# Altium PCB SiLPA_HE.PcbDoc (part 9 of 10)
Units mm, origin at the board's own origin, x right, y up, seen from the top; angles counter-clockwise.
Board outline 222.47 x 100.01 mm, 4 copper layers (Top Layer, Int1 (GND), Int2 (PWR), Bottom Layer), stack 1.508 mm thick; 661 components, 355 nets, 1925 pads, 1744 vias.
Unrouted connection lines stored in the file: 360.
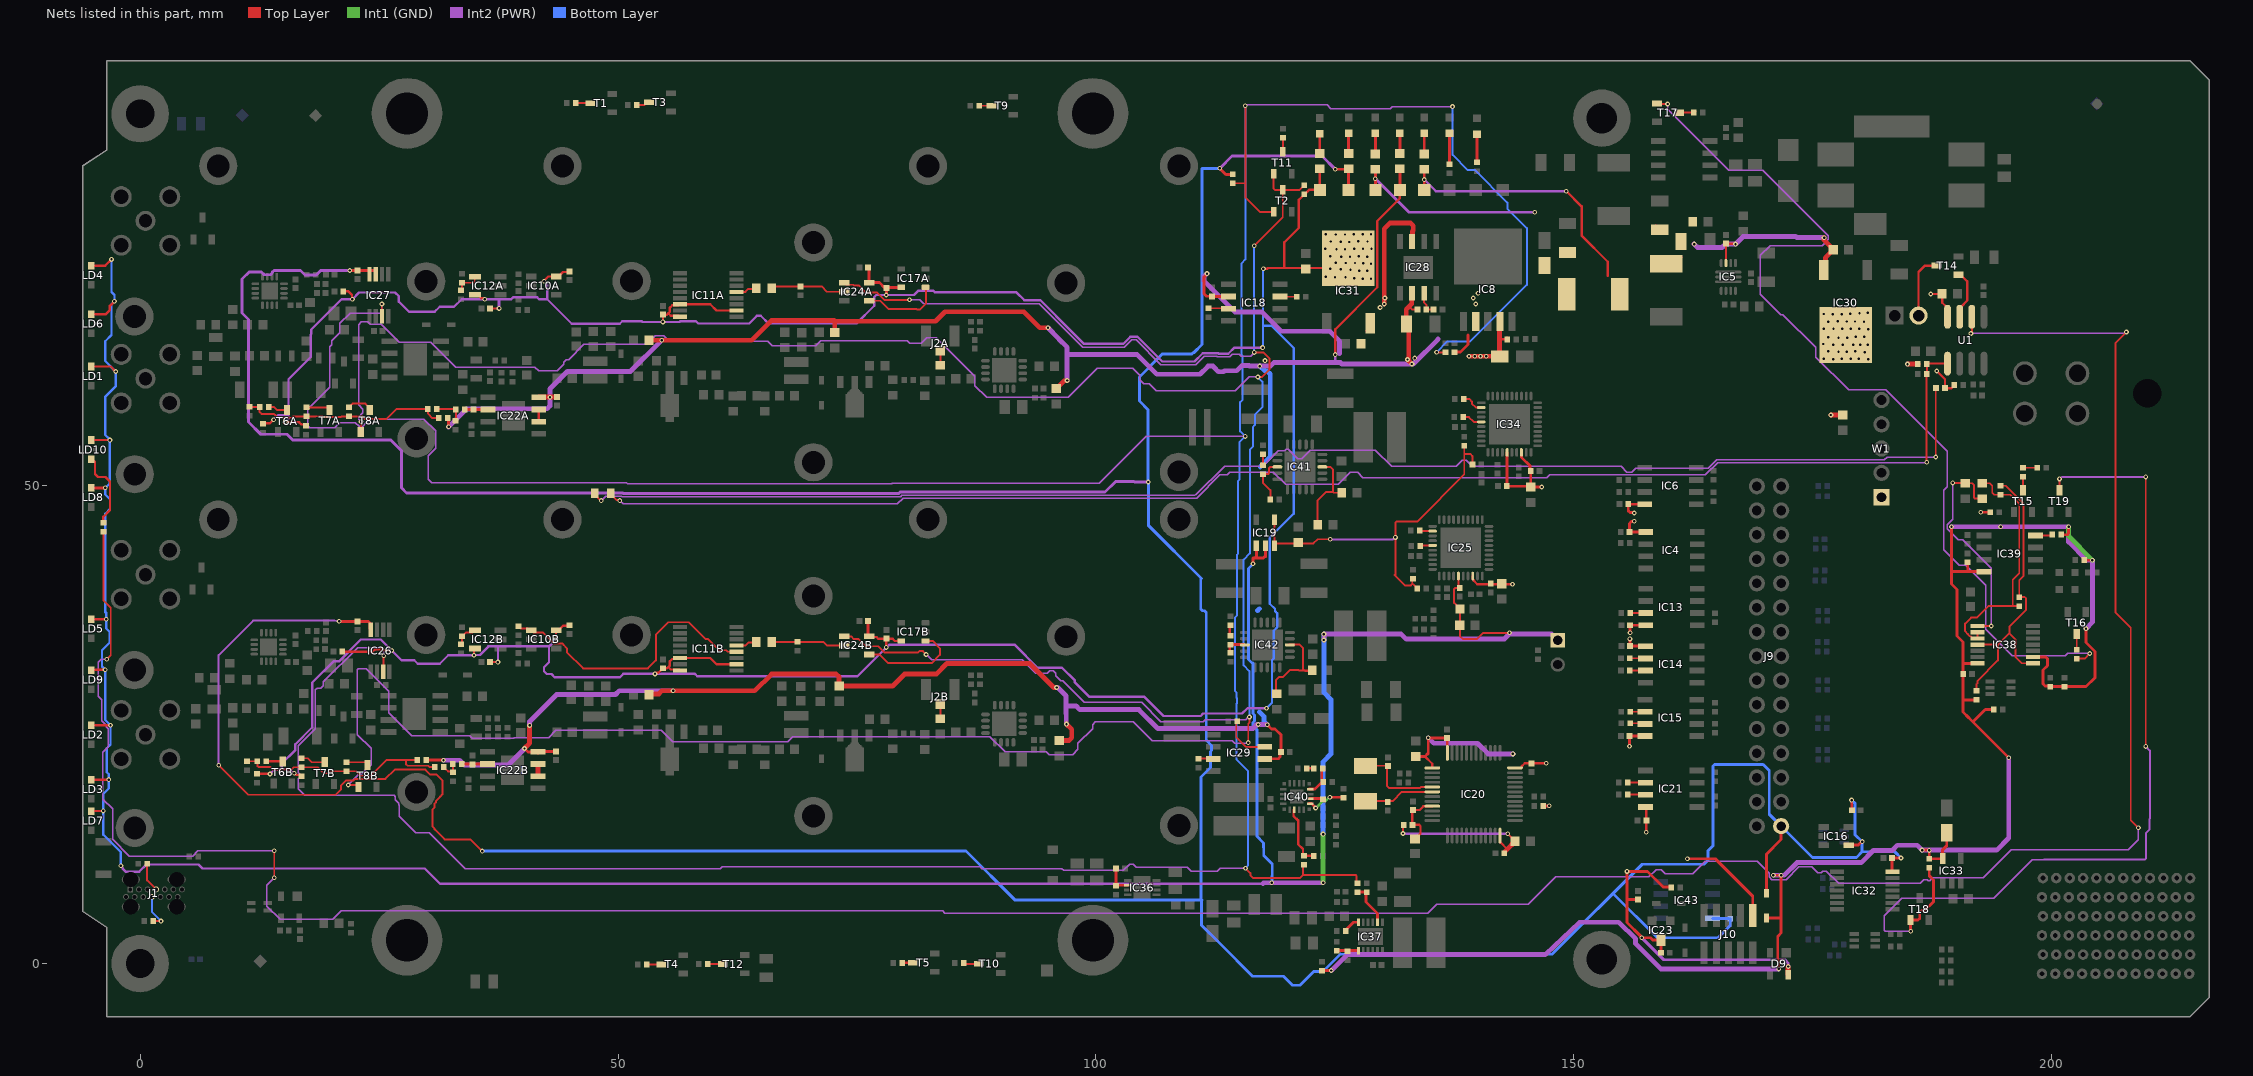
[diagram p8: the nets of this part, all layers, seen from the top]

## Via types
v1: diameter 0.5, hole 0.25, Top Layer to Bottom Layer, tented both sides, 1439 vias
v2: diameter 0.5, hole 0.25, Top Layer to Bottom Layer, tented bottom, 291 vias
v3: diameter 0.5, hole 0.25, Top Layer to Bottom Layer, 12 vias
v4: diameter 0.5, hole 0.25, Top Layer to Bottom Layer, tented top, 2 vias

## Nets (pads, with @x,y where several pads share a name; then routed paths per layer and width w, separated by ;. In a path a pad name is that pad's centre, name@x,y a point inside that pad or via, vN(x,y) a via of type N, cw(c..) or ccw(c..) an arc to the next point about the centre after c; other vN are vias at no path point) (continued)
NetIC10B_1: IC10B.1 IC11B.4 R23B.2 | length 29.2
  Top Layer w0.2: R23B.2@39.587,35.288 39.801,35.074 40.546,35.074 IC10B.1@40.677,34.943 ; IC10B.1@40.917,34.873 41.141,34.649 42.137,34.649 43.286,33.5 44.161,33.5 44.294,33.367 44.294,33.333 44.642,32.985 44.642,32.592 46.344,30.889 53.125,30.889 53.963,31.728 53.963,34.392 55.277,35.705 57.415,35.705 59.177,33.943 59.427,33.943 60.592,32.778 61.334,32.778 61.493,32.618 IC11B.4@62.102,32.618
NetIC11A_5: IC11A.5 R25A.1 | length 2.2
  Top Layer w0.2: IC11A.5@62.377,70.268 62.383,70.274 63.331,70.274 63.645,70.588 64.322,70.588 R25A.1@64.427,70.693
NetIC11B_5: IC11B.5 R25B.1 | length 2.2
  Top Layer w0.2: IC11B.5@62.377,33.268 62.383,33.274 63.331,33.274 63.645,33.588 64.322,33.588 R25B.1@64.427,33.693
NetIC12A_4: IC12A.4 R32A.2 R33A.2 | length 2.7
  Top Layer w0.2: R32A.2@33.427,70.443 33.447,70.443 R32A.2@33.637,70.633 ; 33.677,70.75 R33A.2@33.677,71.223 34.896,71.223 35.013,71.34 IC12A.4@35.013,71.862
NetIC12B_4: IC12B.4 R32B.2 R33B.2 | length 2.5
  Top Layer w0.2: R32B.2@33.447,33.443 33.504,33.443 33.664,33.603 33.664,34.21 R33B.2@33.677,34.223 33.697,34.223 34.112,34.638 34.789,34.638 IC12B.4@35.013,34.862
NetIC13_7: IC13.7 R39.2 | length 1.6
  Top Layer w0.2: R39.2@155.875,36.67 155.88,36.665 IC13.7@157.505,36.665
NetIC14_2: IC14.2 R42.2 | length 1.6
  Top Layer w0.2: R42.2@155.864,31.944 IC14.2@157.494,31.944
NetIC14_3: IC14.3 R43.2 | length 1.6
  Top Layer w0.2: R43.2@155.864,30.674 IC14.3@157.494,30.674
NetIC15_6: IC15.6 R47.2 | length 1.6
  Top Layer w0.2: R47.2@155.897,26.342 IC15.6@157.451,26.342
NetIC15_7: IC15.7 R45.2 | length 1.6
  Top Layer w0.2: R45.2@155.897,25.139 157.384,25.139 IC15.7@157.451,25.072
NetIC17A_1: IC17A.1 IC24A.4 | length 8.3
  Top Layer w0.2: IC24A.4@76.26,69.338 77.424,69.338 78.275,68.488 81.219,68.488 81.286,68.42 81.568,68.42 82.225,69.077 82.225,70.694 IC17A.1@82.167,70.752
NetIC17B_1: IC17B.1 IC24B.4 | length 10.7
  Top Layer w0.2: IC24B.4@76.26,32.338 77.336,32.338 78.249,31.425 82.808,31.425 83.677,32.293 83.677,32.979 82.904,33.752 IC17B.1@82.167,33.752
NetIC18_3: IC18.3 R176.1 | length 1.8
  Top Layer w0.2: IC18.3@119.252,69.789 119.278,69.763 R176.1@121.018,69.763
NetIC18_7: IC18.7 R174.1 | length 2.1
  Top Layer w0.2: R174.1@111.783,68.555 113.816,68.555 IC18.7@113.852,68.519
NetIC21_6: IC21.6 R119.2 | length 1.8
  Top Layer w0.2: R119.2@155.647,18.943 157.457,18.943 IC21.6@157.477,18.923
NetIC21_7: IC21.7 R117.2 | length 1.8
  Top Layer w0.2: R117.2@155.647,17.693 157.437,17.693 IC21.7@157.477,17.653
NetIC22A_2: IC22A.2 R125A.2 R126A.1 | length 2.4
  Top Layer w0.3: R126A.1@33.974,57.968 R125A.2@34.866,57.968 R125A.2@34.866,57.968 36.406,57.966 IC22A.2@36.407,57.965
NetIC22A_6: IC22A.6 IC22A.7 | length 1.3
  Top Layer w0.3: IC22A.6@41.707,56.695 IC22A.7@41.707,57.965
NetIC22B_2: IC22B.2 R125B.2 R126B.1 | length 2.4
  Top Layer w0.3: R126B.1@33.897,20.878 34.789,20.878 IC22B.2@36.33,20.878
NetIC22B_6: IC22B.6 IC22B.7 | length 1.3
  Top Layer w0.508: IC22B.6@41.63,19.608 IC22B.7@41.63,20.878
NetIC24A_1: IC24A.1 IC24B.1 R20.2 T2.3 T8A.1 T8B.1 T11.1 | length 396.2
  Top Layer w0.2: v1(21.771,18.684) 22.323,18.684 22.649,18.684 T8B.1@22.839,18.494 ; T8A.1@23.072,55.625 23.112,55.665 v1(23.112,56.684) ; IC24B.1@73.66,34.238 74.382,34.238 74.677,33.943 75.177,33.943 75.927,33.193 77.241,33.193 77.87,32.565 81.383,32.565 81.511,32.693 81.896,32.693 82.232,32.357 v1(82.232,32.338) ; IC24A.1@73.66,71.238 73.884,71.014 74.606,71.014 74.677,70.943 75.177,70.943 75.927,70.193 77.105,70.193 77.899,69.399 80.449,69.399 v1(80.494,69.443) ; v1(115.928,23.116) 115.928,25.079 116.048,25.199 116.048,25.659 v1@116.148,25.759 ; v1(116.552,63.936) 117.496,63.936 118.154,63.278 118.154,62.185 117.332,61.363 v1(116.938,61.363) ; v1(116.552,75.105) 119.543,78.096 T2.3@119.543,80.943 ; T11.1@118.593,82.629 118.593,81.06 118.71,80.943 T2.3@119.543,80.943 ; R20.2@121.788,81.413 121.768,81.413 121.298,80.943 T2.3@119.543,80.943
  Int2 (PWR) w0.15: v1(21.771,18.684) 22.875,19.789 23.119,19.789 24.156,20.826 24.156,22.516 22.733,23.939 22.733,30.725 22.843,30.835 23.681,30.835 26.023,28.493 26.023,26.249 28.411,23.86 34.469,23.86 34.738,23.592 39.077,23.592 39.133,23.648 42.734,23.648 43.475,24.389 54.531,24.389 55.707,23.213 67.759,23.213 68.288,23.742 88.909,23.742 90.496,22.156 94.824,22.156 95.108,21.871 97.561,21.871 98.115,22.425 98.115,23.031 99.648,24.565 99.648,24.996 99.928,25.275 103.912,25.275 105.885,23.302 114.271,23.302 114.522,23.051 115.862,23.051 v1(115.928,23.116) ; v1(23.112,56.684) 23.112,56.699 22.865,56.947 22.865,57.166 23.317,57.618 23.317,57.992 22.865,58.444 22.865,66.857 23.145,67.137 23.802,67.137 24.069,66.87 25.25,66.87 27.098,65.022 30.408,65.022 33.038,62.393 41.303,62.393 41.684,62.011 43.643,62.011 44.336,62.704 44.336,62.928 44.6,63.192 44.824,63.192 46.402,64.77 52.996,64.77 53.894,65.669 54.757,65.669 55.326,65.101 65.637,65.101 66.124,64.614 70.679,64.614 71.223,65.158 80.263,65.158 80.507,64.914 81.729,64.914 82.284,65.469 83.286,65.469 87.338,61.418 87.338,60.431 88.547,59.221 97.088,59.221 100.141,62.274 103.867,62.274 104.587,61.554 104.587,61.067 104.989,60.665 105.475,60.665 105.476,60.664 105.572,60.664 106.296,59.94 114.574,59.94 116.042,61.408 116.893,61.408 v1(116.938,61.363) ; v1(80.494,69.443) 81.577,69.443 81.979,69.041 94.066,69.041 98.61,64.498 102.968,64.498 102.973,64.503 102.98,64.503 103.737,65.26 104.193,65.26 106.79,62.663 110.459,62.663 111.311,63.515 112.659,63.515 112.705,63.469 113.976,63.469 114.242,63.735 114.969,63.735 115.184,63.521 116.182,63.521 116.552,63.891 v1(116.552,63.936) ; v1(82.232,32.338) 82.806,31.764 92.261,31.764 93.674,30.352 94.884,30.352 95.149,30.616 95.523,30.616 95.788,30.352 95.788,30.087 96.299,29.576 96.546,29.576 98.797,27.325 104.78,27.325 106.796,25.31 111.221,25.31 111.436,25.525 115.678,25.525 115.953,25.8 v1(116.048,25.8)
  Bottom Layer w0.2: v1(116.048,25.8) 116.048,30.596 115.445,31.199 115.445,42.26 116.102,42.917 116.102,53.757 116.409,54.064 116.409,56.133 116.623,56.346 116.623,57.436 117.41,58.222 117.41,60.891 v1(116.938,61.363) ; v1(116.552,63.936) v1(116.552,75.105)
NetIC24A_2: IC24A.2 R25A.2 R166A.2 | length 7.9
  Top Layer w0.2: R25A.2@66.067,70.643 66.273,70.849 71.297,70.849 71.858,70.288 IC24A.2@73.66,70.288 ; IC24A.2@73.66,70.193 IC24A.2@73.677,70.193
NetIC24B_2: IC24B.2 R25B.2 R166B.2 | length 7.8
  Top Layer w0.2: R25B.2@66.067,33.643 71.477,33.643 71.832,33.288 IC24B.2@73.66,33.288 ; IC24B.2@73.66,33.193 IC24B.2@73.677,33.193
NetIC25_22: IC25.22 R88.1 | length 1.4
  Top Layer w0.2: R88.1@133.907,45.118 134.032,45.243 IC25.22@135.217,45.243
NetIC25_25: IC25.25 R87.1 | length 1.3
  Top Layer w0.2: R87.1@133.907,43.743 IC25.25@135.217,43.743
NetIC26_3: IC26.3 IC27.3 R61.2 R103.1 R128.1 R160.1 T2.1 | length 422.6
  Top Layer w0.15: IC27.3@25.3,67.727 v1(25.3,69.004) ; R61.2@114.311,81.625 115.605,81.625 115.627,81.647
  Top Layer w0.2: IC26.3@25.447,29.995 25.453,30.001 25.453,32.178 v1(25.481,32.206) ; v1(115.627,89.743) 115.627,81.647 115.627,80.146 117.13,78.643 T2.1@118.593,78.643 ; v1(115.64,9.971) 116.144,9.467 116.144,9.247 116.423,8.968 121.351,8.968 121.662,9.278 ; R160.1@121.662,10.363 121.662,9.278 ; R128.1@127.274,8.439 127.274,9.161 127.157,9.278 121.662,9.278 ; v1(135.634,63.956) 135.641,63.949 136.576,63.949 R103.1@136.582,63.943
  Int2 (PWR) w0.15: v1(25.3,69.004) 25.3,68.151 25.183,68.033 21.964,68.033 20.896,66.966 20.896,65.972 20.057,65.133 20.057,64.738 19.859,64.539 19.859,60.302 17.554,57.997 17.554,56.244 17.765,56.032 20.34,56.032 20.907,56.599 22.523,56.599 22.915,56.207 23.31,56.207 24.069,56.966 29.7,56.966 30.904,55.762 30.904,53.908 30.144,53.147 30.144,50.646 30.496,50.293 50.901,50.293 50.976,50.218 78.658,50.218 78.676,50.236 100.364,50.236 105.276,55.148 v1(115.605,55.148) ; v1(25.481,32.206) 25.5,32.225 25.5,32.76 25.217,33.043 22.762,33.043 19.18,29.461 19.18,29.081 18.915,28.817 18.536,28.817 18.342,28.623 18.342,24.583 16.565,22.806 16.565,19.96 16.693,19.832 16.693,19.458 16.565,19.33 16.565,18.286 17.236,17.616 26.581,17.616 26.718,17.478 26.718,17.12 26.939,16.9 27.061,16.778 27.061,16.591 27.108,16.544 27.108,15.402 28.843,13.667 30.271,13.667 34.041,9.897 60.676,9.897 60.915,10.137 87.874,10.137 88.066,9.945 96.435,9.945 96.625,9.755 102.868,9.755 103.511,10.397 103.885,10.397 104.198,10.085 109.539,10.085 109.982,9.642 ; 109.895,9.668 112.678,9.668 112.981,9.971 v1(115.64,9.971) ; v1@115.56,89.81 v1(115.627,89.743) ; v1@115.627,89.851 124.172,89.851 124.58,89.443 130.788,89.443 130.996,89.65 v1(137.298,89.65)
  Bottom Layer w0.2: v1(115.627,89.743) 115.627,73.659 115.224,73.256 115.224,63.708 115.331,63.601 115.331,59.002 115.074,58.745 115.074,55.68 v1(115.605,55.148) 115.004,54.547 115.004,50.638 114.877,50.512 114.877,42.895 114.733,42.751 114.733,36.396 114.559,36.223 114.559,28.512 114.722,28.348 114.722,27.78 114.756,27.745 114.756,27.259 114.698,27.201 114.698,21.371 115.901,20.169 115.901,10.238 115.64,9.977 v1(115.64,9.971) ; v1(135.634,63.956) 136.759,65.081 139.157,65.081 145.086,71.009 145.086,76.934 143.034,78.986 143.034,79.608 139.614,83.027 139.449,83.027 139.44,83.018 138.875,83.018 137.298,84.596 v1(137.298,89.65)
NetIC28_7: IC28.7 R82.1 R83.2 | length 2.5
  Top Layer w0.2: IC28.7@134.336,70.129 134.336,69.154 134.575,68.915 R82.1@134.575,68.438 R83.2@135.311,68.438
NetIC29_3: IC29.3 R181.1 | length 1.6
  Top Layer w0.2: R181.1@110.618,21.433 IC29.3@112.176,21.433
NetIC29_7: IC29.7 R180.1 | length 5.1
  Top Layer w0.2: R180.1@114.676,25.376 114.676,23.693 115.73,22.639 117.512,22.639 117.576,22.703 IC29.7@117.591,22.688
NetIC34_22: IC34.22 R99.1 | length 2.3
  Top Layer w0.2: R99.1@138.497,59.043 139.089,59.043 139.332,58.8 139.332,58.593 139.731,58.193 140.292,58.193 IC34.22@140.311,58.174
NetIC34_25: IC34.25 R98.1 | length 2.1
  Top Layer w0.2: R98.1@138.431,57.174 139.022,57.174 139.522,56.674 IC34.25@140.311,56.674
NetIC36_6: IC36.6 R129.1 R132.2 | length 3
  Top Layer w0.3: R132.2@102.094,9.945 102.108,9.932 102.108,8.249 R129.1@102.122,8.235 ; R129.1@102.108,8.163 102.138,8.193 IC36.6@103.326,8.193
NetIC37_2: IC37.2 R104.2 R128.2 | length 4.4
  Top Layer w0.3: R128.2@127.474,7.498 128.235,7.498 128.235,6.458 129.461,5.232 IC37.2@129.461,4.329
NetIC37_6: IC37.6 R130.2 | length 1.8
  Top Layer w0.3: R130.2@126.044,3.415 126.044,3.435 126.927,4.318 127.374,4.318 IC37.6@127.374,4.354
NetIC37_7: IC37.7 R131.1 R134.2 | length 2.3
  Top Layer w0.3: R134.2@125.104,1.368 125.111,1.361 127.374,1.361 IC37.7@127.374,1.354
NetIC38_1: IC38.1 IC38.11 R67.1 R89.1 R90.1 | length 32.7
  Top Layer w0.2: R67.1@192.116,28.532 192.116,29.212 192.228,29.324 192.228,29.591 194.358,31.72 194.358,33.368 ; IC38.11@192.236,33.368 194.358,33.368 ; R89.1@194.636,49.988 195.162,49.988 197.036,48.114 197.036,40.571 196.591,40.126 R90.1@196.591,38.338 197.168,38.338 197.313,38.193 197.313,37.015 195.552,35.254 195.552,34.562 ; IC38.1@198.036,31.418 196.868,31.418 196.184,32.103 196.184,33.93 195.552,34.562 ; 194.358,33.368 195.5,34.511 195.552,34.562
NetIC38_8: IC38.8 R112.1 R115.1 | length 23.3
  Top Layer w0.2: v1(189.631,50.285) 190.651,50.285 R115.1@190.682,50.254 ; R115.1@190.677,50.249 191.654,50.249 191.835,50.068 191.835,48.763 191.949,48.649 R112.1@192.711,48.649 ; IC38.8@192.236,35.318 v1(193.65,35.318)
  Int2 (PWR) w0.15: v1(189.631,50.285) 189.631,46.47 189.05,45.889 189.05,45.514 190.233,44.332 190.669,44.332 193.65,41.351 v1(193.65,35.318)
NetIC38_9: IC38.9 IC38.10 R89.2 R90.2 R112.2 | length 25.7
  Top Layer w0.152: R112.2@192.711,50.249 193.499,50.249 193.746,50.002 193.746,49.28 193.978,49.048 R89.2@194.636,49.048 195.669,49.048 196.601,48.116 196.601,40.851 195.919,40.169 195.919,37.398
  Top Layer w0.2: IC38.9@192.236,34.668 IC38.10@192.236,34.018 191.736,34.018 191.514,34.24 191.427,34.24 191.226,34.44 191.226,34.473 190.927,34.772 190.927,35.566 191.554,36.193 192.159,36.193 193.364,37.398 195.919,37.398 R90.2@196.591,37.398
NetIC39_4: IC39.4 R197.1 | length 1.8
  Top Layer w0.2: IC39.4@198.291,44.791 199.944,44.791 R197.1@200.021,44.868
NetIC40_1: IC40.1 R161.2 | length 4.2
  Top Layer w0.25: IC40.1@122.314,16.754 122.539,16.754 122.978,16.315 v1(122.978,16.27) ; v1(124.473,17.394) R161.2@125.83,17.394
  Int1 (GND) w0.25: v1(122.978,16.27) 123.02,16.27 123.749,16.999 124.01,16.999 124.405,17.394 v1(124.473,17.394)
NetIC40_2: IC40.2 R136.1 | length 1.4
  Top Layer w0.3: IC40.2@122.314,17.254 123.65,17.254 R136.1@123.68,17.224
NetIC40_4: IC40.4 R143.1 R152.2 | length 3.2
  Top Layer w0.3: IC40.4@122.314,18.254 122.924,18.254 123.67,19.001 123.67,19.021 123.615,19.076 123.615,20.385 R143.1@123.56,20.44
NetIC40_14: IC40.14 R159.2 R160.2 | length 6.4
  Top Layer w0.25: IC40.14@120.664,16.104 120.664,15.429 120.952,15.141 120.986,15.141 121.144,14.983 121.144,12.492 121.663,11.973 R160.2@121.663,11.283 ; R160.2@121.624,11.283 R159.2@122.727,11.283
NetIC41_3: IC41.3 R142.1 R144.2 | length 5.1
  Top Layer w0.2: R144.2@118.237,48.609 118.237,49.537 117.457,50.317 R142.1@117.457,51.212 118.003,51.212 118.12,51.329 118.12,51.843 118.237,51.96 IC41.3@118.98,51.96
NetIC41_13: IC41.13 R137.1 R171.2 | length 9
  Top Layer w0.2: R171.2@123.195,45.893 123.195,48.457 124.086,49.348 124.805,49.348 ; IC41.13@123.68,51.96 124.517,51.96 124.805,51.672 124.805,49.348 ; R137.1@125.707,49.26 124.893,49.26 124.805,49.348
NetIC42_3: IC42.3 R156.1 R157.2 | length 2.3
  Top Layer w0.3: R157.2@114,32.53 114,33.364 114.002,33.362 115.491,33.362 IC42.3@115.493,33.36
NetIC42_13: IC42.13 R153.1 R172.2 | length 10.3
  Top Layer w0.2: R172.2@118.84,28.238 118.84,29.69 119.118,29.968 119.549,29.968 120.276,30.695 121.204,30.695 121.24,30.66 121.803,30.66 ; IC42.13@120.193,33.36 121.292,33.36 121.664,32.987 121.664,30.798 121.803,30.66 ; R153.1@122.54,30.718 R153.1@122.445,30.623 ; 121.803,30.66 121.84,30.623 R153.1@122.445,30.623 ; 121.803,30.66 122.408,30.66 R153.1@122.445,30.623
NetJ1_A6: J1.A6 R94.1 | length 3.1
  Top Layer w0.2: R94.1@0.736,10.447 0.736,8.699 J1.A6@1.677,7.758
NetJ1_B6: J1.B6 R95.1 | length 3.8
  Top Layer w0.2: R95.1@1.367,4.443 v1(2.191,4.443)
  Bottom Layer w0.2: J1.B6@1.227,6.978 1.227,5.407 v1(2.191,4.443)
NetJ2A_1: J2A.1 R4A.1 | length 1.5
  Top Layer w0.245: R4A.1@83.728,62.809 J2A.1@83.728,64.294
NetJ2B_1: J2B.1 R4B.1 | length 1.5
  Top Layer w0.245: R4B.1@83.728,25.809 J2B.1@83.728,27.294
NetJ11_2: J11.2 T14.3 | length 6.7
  Top Layer w0.245: J11.2@186.152,67.893 186.052,67.993 186.052,72.355 186.715,73.018 T14.3@187.952,73.018
NetLD10_1: LD10.1 R55.2 | length 8
  Top Layer w0.245: LD10.1@-5.1,52.555 LD10.1@-5.002,52.555 ; LD10.1@-4.788,52.555 -4.723,52.49 -4.723,51.206 -4.42,50.902 -3.609,50.902 -3.148,50.441 -3.148,47.446 -3.838,46.755 R55.2@-3.838,46.107
NetLD11_2: LD11.2 R218.2 | length 3.3
  Top Layer w0.3: R218.2@136.977,83.613 LD11.2@136.977,86.868
NetLD12_2: LD12.2 R106.2 | length 2.2
  Top Layer w0.3: R106.2@134.336,84.695 LD12.2@134.336,86.868
NetLD13_2: LD13.2 R107.2 | length 2.9
  Top Layer w0.3: R107.2@139.859,83.851 LD13.2@139.859,86.768
NetLD14_2: LD14.2 R108.2 | length 2.2
  Top Layer w0.3: R108.2@129.227,84.695 LD14.2@129.227,86.868
NetLD15_2: LD15.2 R109.2 | length 2.1
  Top Layer w0.3: R109.2@126.427,84.743 LD15.2@126.427,86.868
NetLD16_2: LD16.2 R110.2 | length 2.1
  Top Layer w0.245: R110.2@123.427,84.743 LD16.2@123.427,86.809
NetLD18_2: LD18.2 R216.2 | length 2.1
  Top Layer w0.3: R216.2@131.796,84.743 LD18.2@131.796,86.868
NetR11_2: R11.2 T1.3 | length 1.5
  Top Layer w0.2: R11.2@45.587,90.043 47.082,90.043 T1.3@47.112,90.013
NetR12_2: R12.2 T3.3 | length 1.4
  Top Layer w0.2: R12.2@51.962,89.803 52.742,89.803 53.041,90.102 T3.3@53.241,90.102
NetR14_2: R14.2 T4.3 | length 1.5
  Top Layer w0.2: R14.2@53.003,-0.089 T4.3@54.513,-0.089
NetR15_2: R15.2 T12.3 | length 1.6
  Top Layer w0.2: R15.2@59.376,-0.049 T12.3@60.965,-0.049
NetR29A_1: R29A.1 T6A.3 | length 2
  Top Layer w0.2: R29A.1@13.439,58.463 13.651,58.463 13.658,58.456 R29A.1@13.658,58.287 ; R29A.1@13.658,58.218 14.018,58.218 14.312,57.925 T6A.3@15.164,57.925
NetR29A_2: R29A.2 R59A.2 R60A.2 R124A.1 R141A.2 R165A.1 | length 21.8
  Top Layer w0.2: R141A.2@11.427,58.248 12.49,58.248 R29A.2@12.509,58.228 12.509,57.698 12.704,57.503 14.005,57.503 14.131,57.377 14.163,57.377 14.441,57.098 15.869,57.098 16.026,57.255 R59A.2@17.406,57.255 18.334,57.255 18.337,57.257 19.055,57.257 19.138,57.175 21.001,57.175 21.081,57.255 R60A.2@21.837,57.255 23.226,57.255 23.49,56.99 25.793,56.99 26.813,58.011 R165A.1@30.083,58.011 30.12,57.974 30.12,57.518 30.576,57.062 R124A.1@31.07,57.062
NetR29B_1: R29B.1 T6B.3 | length 2
  Top Layer w0.245: R29B.1@13.212,21.169 14.729,21.169 14.931,20.967 T6B.3@14.931,20.794
NetR29B_2: R29B.2 R59B.2 R60B.2 R124B.1 R141B.2 R165B.1 | length 23.4
  Top Layer w0.2: R141B.2@11.163,21.182 11.176,21.169 R29B.2@12.272,21.169 12.272,20.655 12.36,20.567 13.614,20.567 13.883,20.298 15.837,20.298 16.08,20.541 R59B.2@16.864,20.541 18.577,20.541 19.204,19.914 19.62,19.914 19.83,20.124 R60B.2@21.604,20.124 22.597,20.124 23.071,19.649 24.122,19.649 25.752,21.279 R124B.1@29.005,21.279 R124B.1@29.088,21.197 ; 27.808,21.215 27.808,20.878 27.994,20.692 30.144,20.692 30.286,20.55 R165B.1@30.83,20.55
NetR53_1: R53.1 R54.2 | length 1.5
  Top Layer w0.2: R54.2@196.971,51.873 R53.1@198.487,51.873
NetR54_1: R54.1 T15.3 | length 1.4
  Top Layer w0.2: R54.1@196.971,50.933 196.986,50.918 T15.3@196.986,49.518
NetR55_1: R55.1 U1.6 | length 334.9
  Top Layer w0.15: v1(14.034,8.971) v1(14.034,11.811)
  Top Layer w0.2: R55.1@-3.838,45.167 -3.838,37.988 -3.073,37.223 -3.073,32.266 v1(-3.492,31.846) ; v1(191.527,65.918) 191.538,65.918 191.627,66.007 U1.6@191.627,67.668 ; v1(207.802,66.068) 206.65,64.916 206.65,36.762 208.254,35.158 208.254,15.015 v1(209.052,14.218)
  Int2 (PWR) w0.15: v1(-3.492,31.846) -4.062,31.846 -4.398,31.51 -4.398,27.983 -4.028,27.613 -4.028,25.428 -3.548,24.948 -3.548,24.756 -3.34,24.548 -3.34,22.662 -3.884,22.119 -3.884,17.207 -2.87,16.193 -2.87,12.984 -1.137,11.251 5.485,11.251 6.045,11.811 v1(14.034,11.811) ; v1(14.034,8.971) 13.275,8.212 13.275,6.005 14.664,4.616 20.139,4.616 21.029,5.506 83.964,5.506 84.179,5.291 134.709,5.291 135.629,6.211 145.227,6.211 148.077,9.062 157.84,9.062 158.597,9.818 159.135,9.818 159.537,9.416 162.446,9.416 163.718,10.688 169.161,10.688 170.415,9.433 170.415,9.059 170.68,8.794 172.202,8.794 173.525,10.117 174.864,10.117 175.49,9.491 175.864,9.491 176.039,9.666 176.423,9.666 177.694,8.395 186.223,8.395 186.611,8.784 186.986,8.784 187.083,8.686 187.208,8.686 187.501,8.979 192.838,8.979 195.75,11.891 207.991,11.891 209.052,12.952 v1(209.052,14.218) ; v1(191.527,65.918) 207.558,65.918 207.708,66.068 v1(207.802,66.068)
NetR56_1: R56.1 R58.2 RT1.1 U1.1 | length 154.1
  Top Layer w0.2: RT1.1@49.252,49.193 49.252,49.093 49.851,48.494 50.119,48.494 v1(50.176,48.437) ; R56.1@186.827,62.818 186.927,62.718 R58.2@186.927,61.693 186.902,61.668 v1(186.902,52.443) ; R56.1@187.002,62.768 U1.1@189.087,62.768
  Int2 (PWR) w0.15: v1(50.176,48.437) 50.529,48.084 79.226,48.084 79.842,48.7 110.522,48.7 112.945,51.124 113.713,51.124 114.007,51.418 118.56,51.418 119.828,50.15 125.346,50.15 126.591,51.395 127.362,51.395 127.926,50.832 147.155,50.832 147.447,51.124 163.749,51.124 164.441,51.815 164.449,51.815 165.048,52.414 186.823,52.414 v1@186.927,52.518
NetR59A_1: R59A.1 T7A.3 | length 2.6
  Top Layer w0.2: R59A.1@17.406,58.195 19.6,58.195 19.825,57.97 T7A.3@19.825,57.925
NetR59B_1: R59B.1 T7B.3 | length 2.8
  Top Layer w0.2: R59B.1@16.864,21.481 17.543,21.481 17.96,21.064 19.074,21.064 19.323,20.815 T7B.3@19.323,20.794
NetR60A_1: R60A.1 T8A.3 | length 2.7
  Top Layer w0.2: R60A.1@21.837,58.195 21.857,58.195 22.047,58.385 22.047,58.405 22.225,58.583 23.564,58.583 24.022,58.125 T8A.3@24.022,57.925
NetR60B_1: R60B.1 T8B.3 | length 2.3
  Top Layer w0.2: R60B.1@21.604,21.064 23.541,21.064 23.789,20.815 T8B.3@23.789,20.794
NetR64_2: R64.2 T11.3 | length 1.5
  Top Layer w0.2: T11.3@119.543,84.929 119.567,84.953 R64.2@119.567,86.417
NetR72_1: R72.1 T17.3 | length 1.7
  Top Layer w0.2: T17.3@161.002,89.018 R72.1@162.602,89.018 ; R72.1@162.655,89.193 R72.1@162.73,89.118
NetR74_2: R74.2 T9.3 | length 1.3
  Top Layer w0.2: R74.2@87.776,89.743 T9.3@89.068,89.743
NetR84_2: R84.2 T10.3 | length 1.6
  Top Layer w0.2: R84.2@86.169,0.069 86.269,-0.031 T10.3@87.719,-0.031
NetR100_2: R100.2 T5.3 | length 1.1
  Top Layer w0.25: R100.2@79.716,0.069 79.728,0.081 80.815,0.081 T5.3@80.827,0.093
NetR105_1: R105.1 RT1.2 | length 153
  Top Layer w0.2: RT1.2@47.552,49.193 47.552,49.093 48.214,48.431 v1(48.251,48.431) ; v1(187.852,52.993) 187.852,60.163 R105.1@187.882,60.193
  Int2 (PWR) w0.15: v1(48.251,48.431) 48.707,48.887 50.363,48.887 50.407,48.843 79.56,48.843 79.692,48.975 110.408,48.975 ; 110.461,49.031 113.457,52.028 113.705,52.028 113.728,52.005 117.45,52.005 119.079,53.634 119.736,53.634 119.928,53.825 120.125,53.825 121.125,52.825 121.523,52.825 122.423,53.725 129.221,53.725 130.918,52.028 137.715,52.028 138.34,52.652 138.714,52.652 139.339,52.028 154.929,52.028 155.54,51.416 156.063,51.416 156.462,51.815 164.049,51.815 164.927,52.693 182.481,52.693 182.781,52.993 v1@187.877,52.993
NetR114_1: R114.1 T17.1 | length 97.9
  Top Layer w0.2: T17.1@158.702,89.968 158.748,89.922 v1(159.804,89.922) ; R114.1@202.602,31.898 203.43,31.898 v1(203.975,32.443)
  Int2 (PWR) w0.15: v1(159.804,89.922) 159.804,89.379 166.189,82.994 169.771,82.994 176.633,76.132 176.633,75.754 175.987,75.108 170.534,75.108 169.504,74.078 169.504,70.007 171.616,67.895 171.864,67.895 175.305,64.454 175.305,63.451 178.746,60.01 182.613,60.01 189.05,53.573 189.05,49.864 188.682,49.497 188.682,43.317 190.322,41.677 191.016,41.677 193.089,39.604 193.089,34.976 195.879,32.186 201.391,32.186 201.649,32.443 v1(203.975,32.443)
NetR114_2: R114.2 T16.3 | length 1.7
  Top Layer w0.2: R114.2@202.602,32.838 T16.3@202.602,34.491
NetR116_1: R116.1 T18.1 T19.3 | length 93.3
  Top Layer w0.2: T19.3@200.802,49.518 v1(200.802,50.704) ; v1(209.825,22.723) v1(209.825,50.915)
  Top Layer w0.3: v1(185.227,3.384) T18.1@185.227,4.543 186.001,4.543 186.177,4.719 186.177,5.362 186.353,5.538 186.678,5.538 187.602,6.462 187.602,8.76 187.177,9.185 R116.1@187.177,10.023
  Int2 (PWR) w0.2: v1(185.227,3.384) 182.582,3.384 182.465,3.501 182.465,5.006 184.292,6.833 193.934,6.833 197.96,10.859 199.149,10.859 199.149,10.902 209.752,10.902 209.869,11.019 209.869,13.68 210.209,14.02 210.209,15.096 210.266,15.153 210.266,22.282 v1(209.825,22.723) ; v1(200.802,50.704) 200.883,50.704 201.095,50.915 v1(209.825,50.915)
  Int1 (GND) w0.3: v1@185.227,3.294 v1(185.227,3.384)
NetR126A_2: R126A.2 R127A.1 R165A.2 | length 3.2
  Top Layer w0.2: R165A.2@31.023,58.011 32.99,58.011 R126A.2@33.034,57.968 33.034,56.813 R127A.1@32.99,56.77
NetR126B_2: R126B.2 R127B.1 R165B.2 | length 2.1
  Top Layer w0.2: R165B.2@31.77,20.55 31.77,20.53 31.96,20.34 31.98,20.34 32.224,20.096 32.625,20.096 R127B.1@32.717,20.004 R126B.2@32.717,20.878
NetR135_1: R135.1 R143.2 | length 0.7
  Top Layer w0.3: R135.1@121.947,20.44 R143.2@122.62,20.44
NetR140_1: R140.1 R142.2 | length 1.1
  Top Layer w0.2: R142.2@117.457,52.152 R140.1@117.457,53.269
NetR154_1: R154.1 R156.2 | length 1.1
  Top Layer w0.3: R156.2@114,34.304 R154.1@114,35.404
NetT14_1: T14.1 U1.7 | length 4.3
  Top Layer w0.245: T14.1@190.252,72.068 190.452,72.068 191.152,71.368 191.152,69.363 190.482,68.693 U1.7@190.327,68.693
OSCIN: C72.1 IC20.5 Q1.1 | length 10
  Top Layer w0.2: Q1.1@128.088,20.7 Q1.1@128.758,21.369 ; Q1.1@128.471,20.696 130.323,20.696 C72.1@130.44,20.579 ; C72.1@130.462,20.649 130.462,18.553 130.63,18.385 133.913,18.385 133.996,18.468 IC20.5@135.188,18.468 ; C72.1@130.513,20.579 C72.1@130.513,20.7
OSCOUT: C73.1 IC20.6 Q1.2 | length 7.1
  Top Layer w0.2: Q1.2@128.471,16.996 131.03,16.996 132.004,17.97 132.087,17.97 132.108,17.97 132.115,17.968 IC20.6@135.188,17.968
P2V5REF: C70.2 IC19.3 IC19.4 R85.2 R86.2 R96.2 R97.2 | length 38.6
  Top Layer w0.2: IC19.4@118.676,46.425 118.676,43.767 118.874,43.966 C70.2@120.732,43.966 ; C70.2@121.036,43.95 122.754,43.95 123.192,44.388 v1(124.517,44.388) ; 131.235,40.649 132.324,39.56 132.937,39.56 133.09,39.713 R86.2@133.09,40.298 ; 131.322,40.624 v1(131.322,44.584) 131.322,46.115 131.439,46.233 133.59,46.233 138.527,51.17 138.527,53.299 ; 133.177,39.688 133.602,39.263 R85.2@133.602,39.243 ; R97.2@138.527,54.173 138.527,53.299 ; R96.2@139.389,52.2 139.389,53.1 139.191,53.299 138.527,53.299
  Int2 (PWR) w0.2: v1@124.444,44.375 131.055,44.375 131.264,44.584 v1(131.322,44.584)
P3V3: C10.2 C29.2 C32.2 C62.2 C63.2 C64.2 C66.1 C69.2 C78.2 C79.1 C80.1 C81.1 C82.2 C87.2 C89.2 C90.2 C91.2 C92.2 C104.2 C105.2 C113.2 C116.2 D9.4 FB1.1 IC4.1 IC6.8 IC13.8 IC14.1 IC15.8 IC19.1 IC19.2 IC20.1 IC20.24 IC20.36 IC20.48 IC21.8 IC23.3 IC25.35 IC25.38 IC30.3 IC34.35 IC34.38 J10.1 JP1.1 LD1.2 LD2.2 LD3.2 LD4.2 LD5.2 LD6.2 LD7.2 LD8.2 LD9.2 LD10.2 R22.2 R56.2 R57.2 R66.1 R75.1 R93.1 R105.2 R108.1 TP3.1 U1.8 W1.1 | length 467.7
  Top Layer w0.2: IC25.35@137.917,40.543 137.917,39.552 138.177,39.291 137.575,39.291 137.458,39.174 137.458,37.724 C89.2@138.072,37.11 C87.2@138.072,35.412 ; C87.2@138.055,35.395 C87.2@138.072,35.412 ; v1(143.261,34.601) 140.514,34.601 139.852,33.94 138.401,33.94 138.072,34.269 C87.2@138.072,35.412
  Top Layer w0.245: LD3.2@-5.1,19.243 -5.094,19.249 v3(-3.275,19.249) ; -4.723,15.968 v1(-3.848,15.968) ; -4.723,24.943 v1(-3.096,24.943) ; -4.723,30.743 v1(-3.66,30.743) ; -4.723,36.025 v1(-3.55,36.025) ; -4.723,54.768 v1(-3.163,54.768) ; -4.723,62.464 -3.08,62.464 v1(-2.559,61.943) ; -4.723,67.943 -3.581,67.943 -3.158,68.366 -3.158,68.807 v1(-2.686,69.279) ; -4.723,73.002 -3.664,73.002 v1(-2.998,73.668) ; v1(132.115,13.607) FB1.1@132.115,14.543 ; 134.426,21.664 135.188,20.903 IC20.1@135.188,20.468 ; C79.1@136.727,23.593 136.752,23.568 136.752,22.054 IC20.48@136.763,22.043 IC20.48@136.763,22.718 ; IC25.38@139.417,40.543 139.417,40.231 139.513,40.135 139.513,40.06 139.885,39.688 v1(143.571,39.688) ; IC20.24@142.263,13.393 142.263,12.733 142.305,12.691 142.312,12.691 143.035,11.968 ; v1(143.077,13.593) 143.077,13.582 143.838,12.821 C82.2@143.838,12.771 ; IC20.36@143.838,20.468 144.5,20.468 144.522,20.489 144.522,20.608 144.861,20.947 C81.1@145.496,20.947 ; C81.1@145.552,20.947 v1(147.11,20.947) ; v1(187.322,70.048) 188.507,70.048 C113.2@188.527,70.068 188.527,69.128 189.027,68.628 U1.8@189.027,68.193 ; v1(187.952,61.993) 188.822,61.123 R105.2@188.822,60.193 189.502,60.193 189.777,60.468 R57.2@189.802,60.468 ; v1(192.564,47.218) R22.2@193.535,47.218
  Top Layer w0.3: -4.723,49.768 v1(-3.647,49.768) ; v1(116.428,41.817) 116.428,42.439 116.427,42.44 116.607,42.44 ; 116.689,42.522 116.607,42.44 ; IC19.1@116.697,43.803 IC19.1@116.776,43.725 116.776,42.497 ; 117.639,42.584 117.495,42.44 116.607,42.44 ; 117.726,42.558 IC19.2@117.726,43.725 ; TP3.1@129.227,80.943 v1(129.227,82.111) R108.1@129.227,83.095 ; C78.2@133.46,21.664 134.426,21.664 134.761,21.999 134.761,22.786 ; 134.759,22.789 v1(134.759,23.629) 134.777,23.611 136.709,23.611 C79.1@136.727,23.593 ; IC34.35@143.011,53.474 143.011,49.977 C105.2@142.977,49.943 145.412,49.943 C104.2@145.487,49.868 ; IC34.38@144.511,53.474 144.511,52.957 145.425,52.043 145.425,51.584 C29.2@145.487,51.522 C104.2@145.487,49.868 ; v1(146.627,49.857) C104.2@145.498,49.857 C104.2@145.487,49.868 ; R75.1@146.772,16.468 146.795,16.491 147.403,16.491 v1(147.426,16.514) ; 155.557,6.697 155.557,4.296 156.999,2.854 156.999,2.85 v1@157.125,2.725 ; 155.557,6.701 C66.1@156.685,6.701 ; 155.557,6.727 v1(155.557,9.643) 157.71,9.643 159.347,8.007 160.17,8.007 R93.1@160.202,7.976 ; C32.2@155.802,45.164 155.802,46.028 156.007,46.233 156.263,46.233 v1(156.301,46.271) ; v1(155.818,22.735) C64.2@155.818,23.802 IC15.8@157.293,23.802 ; v1(155.856,33.963) 155.86,33.959 155.86,33.218 155.873,33.206 157.469,33.206 IC14.1@157.477,33.197 ; v1(155.875,34.613) C63.2@155.875,35.395 IC13.8@157.505,35.395 ; C32.2@156.051,45.148 IC4.1@157.506,45.148 ; v1(156.301,47.141) 156.263,47.18 155.869,47.18 155.681,47.367 C10.2@155.681,48.058 IC6.8@157.405,48.058 ; v1(157.099,2.696) 158.024,2.696 158.271,2.449 IC23.3@159.109,2.449 R66.1@159.109,1.132 ; IC21.8@157.477,16.383 157.572,16.288 C116.2@157.572,14.957 v1(157.572,13.729) ; v1@161.861,10.963 164.79,10.963 168.707,7.046 J10.1@168.707,5.032
  Top Layer w0.508: C80.1@142.713,11.543 142.769,11.599 142.769,11.702 143.035,11.968 C82.2@143.838,12.771 ; IC21.8@157.477,16.383 IC21.8@157.523,16.429 ; D9.4@172.412,-1.168 v1(172.412,-0.307) ; v1(176.881,57.393) C69.2@178.127,57.393 ; IC30.3@177.477,64.793 IC30.3@178.427,65.743 IC30.3@180.814,63.355 ; v1(184.902,62.718) R56.2@185.982,62.718
  Int2 (PWR) w0.245: v1(-2.009,10.239) -2.009,10.17 -1.803,9.964 -1.803,9.892 -1.53,9.619 -0.092,9.619 0.659,10.37 6.108,10.37 6.527,9.951 29.772,9.951 31.376,8.347 117.548,8.347 ; v1(132.115,13.607) v1@132.12,13.602 ; v1@132.207,13.577 143.061,13.577 v1(143.077,13.593)
  Int2 (PWR) w0.3: v1(129.227,82.111) 132.742,78.596 v1(145.891,78.596) ; v1(157.099,2.696) 159.39,0.406 172.054,0.406 172.412,0.048 v1(172.412,-0.307)
  Int2 (PWR) w0.508: 117.462,8.372 117.543,8.453 v1(118.388,8.453) v1(123.759,8.453) ; v1(123.84,33.846) v1(123.84,34.471) 131.918,34.471 132.393,33.996 ; 132.48,33.97 142.739,33.97 143.261,34.492 147.639,34.492 JP1.1@148.31,33.821 ; v1(134.759,23.629) 135.34,23.048 139.916,23.048 141.03,21.934 v1(143.616,21.934)
  Int1 (GND) w0.508: v1(123.759,8.453) v1(123.759,13.543)
  Bottom Layer w0.245: v1(-2.998,73.668) -2.998,70.243 -2.686,69.931 v1(-2.686,69.279) -2.998,68.967 -2.998,65.762 -3.647,65.112 -3.647,63.031 v1(-2.559,61.943) -2.559,60.369 -3.66,59.268 -3.66,55.334 -3.163,54.837 -3.163,50.252 v1(-3.647,49.768) -3.647,49.085 -3.148,48.585 -3.148,47.561 -3.647,47.062 -3.647,36.721 -3.55,36.721 v1(-3.55,36.025) -3.55,35.061 -3.201,34.713 -3.201,33.571 -3.992,32.781 -3.992,31.075 v1(-3.66,30.743) -3.66,25.507 v1(-3.096,24.943) -3.096,22.928 -3.492,22.532 -3.492,20.03 -3.275,19.813 v3(-3.275,19.249) -3.275,18.315 -3.848,17.742 v1(-3.848,15.968) -3.848,13.493 -2.009,11.654 v1(-2.009,10.239)
  Bottom Layer w0.3: v1(116.428,41.817) 116.428,41.802 115.94,41.315 115.94,31.812 116.306,31.446 116.425,31.446 116.425,26.168 116.575,26.018 116.575,25.369 116.438,25.233 116.438,24.796 116.747,24.487 116.844,24.487 116.844,13.321 117.534,12.631 117.534,12.149 117.557,12.126 117.557,11.303 118.438,10.422 118.438,9.158 118.426,9.146 118.426,8.492 v1(118.388,8.453)
  Bottom Layer w0.508: v1(123.759,13.543) 123.759,21.103 124.586,21.931 124.586,27.619 123.84,28.365 v1(123.84,33.846) v1(123.84,34.471)
  other v1: 161.875,10.963
  other v2: 177.148,63.205 180.805,63.205 176.127,63.268 178.027,63.268 178.952,63.268 179.802,63.293 180.43,63.955 177.68,64.005 178.552,64.018 176.627,64.043 179.427,64.043 177.148,64.73 178.13,64.73 179.205,64.73 179.955,64.73 180.727,64.743 176.077,64.818 177.68,65.48 178.605,65.48 176.602,65.543 179.477,65.568 180.377,65.568 180.777,66.368 177.152,66.393 179.852,66.393 176.127,66.418 178.052,66.418 178.952,66.418 176.627,67.143 180.352,67.143 178.527,67.168 179.402,67.168 177.602,67.193 177.07,67.928 178.002,67.943 176.12,67.953 178.927,67.993 179.877,68.018 180.752,68.068
P3V3_DIOT: C77.1 C165.2 C167.2 D12.2 IC33.5 IC38.2 IC38.14 IC39.8 R65.2 R67.2 R79.1 R111.1 R113.1 R116.2 R197.2 R274.1 | length 189.6
  Top Layer w0.3: R65.2@123.56,-0.726 v1(124.61,-0.726) ; D12.2@170.141,4.768 171.665,4.768 171.681,4.751 ; v1(170.867,9.246) v1(171.677,9.246) ; v1(171.427,-0.557) 171.427,0.378 171.331,0.474 171.331,2.848 171.681,3.199 171.681,4.751 ; v1@171.681,9.246 171.681,4.751 ; v1(186.427,11.868) v1@187.177,11.868 ; v1(187.177,11.843) R116.2@187.177,10.963 188.547,10.963 IC33.5@188.577,10.993 188.577,11.901 189.004,12.328 C77.1@189.004,13.681 ; 189.478,41.029 189.502,41.029 ; v1(189.502,45.702) 189.502,41.029 ; 191.021,26.002 190.702,26.321 190.702,27.586 ; 191.042,25.981 191.7,25.323 195.479,21.544 v1(195.483,21.544) ; C165.2@191.162,41.986 191.199,41.949 191.199,41.066 191.236,41.029 ; 191.721,25.344 191.796,25.344 193.04,26.589 R79.1@193.932,26.589 ; R67.2@192.116,27.592 190.708,27.592 190.702,27.586 ; IC38.14@192.236,31.418 192.205,31.387 190.702,31.387 ; IC39.8@192.891,40.981 192.844,41.029 191.236,41.029 ; IC38.2@198.036,32.068 199.355,32.068 199.53,31.892 199.53,31.165 199.066,30.701 199.066,29.275 199.29,29.051 199.761,29.051 R113.1@199.832,28.98 R111.1@201.332,28.98 203.575,28.98 204.502,29.906 204.502,32.661 203.575,33.587 v1(203.575,35.043) ; R197.2@200.961,44.868 201.603,44.868 201.752,45.017 v1(201.752,45.702) ; R274.1@203.394,42.199 v1(204.246,42.199) ; 189.502,41.029 191.236,41.029 ; 189.502,41.029 189.502,39.717 190.069,39.15 190.069,34.277 190.702,33.644 190.702,31.387 ; 190.702,27.586 190.702,30.268 C167.2@190.727,30.293 190.702,30.318 190.702,31.387
  Int2 (PWR) w0.5: v1(124.61,-0.726) 126.279,0.943 146.982,0.943 150.584,4.321 154.701,4.321 156.449,2.573 156.449,2.08 159.086,-0.557 v1(171.427,-0.557) ; v1(170.867,9.246) v1(171.677,9.246) 172.015,9.246 173.337,10.569 175.416,10.569 175.417,10.57 175.937,10.57 175.938,10.569 180.052,10.569 181.313,11.83 183.286,11.83 183.831,12.374 185.921,12.374 v1(186.427,11.868) 194.213,11.868 195.483,13.139 v1(195.483,21.544) ; v1(189.502,45.702) v1(194.636,45.702) v1(201.752,45.702) 201.752,44.118 203.671,42.199 v1(204.246,42.199) 204.246,35.714 v1(203.575,35.043)
  Int1 (GND) w0.5: v1(201.752,45.702) 201.752,44.694 v1(204.246,42.199)
P3V3_MP: C65.2 C75.2 C76.2 C100.2 C103.2 D12.1 IC16.4 IC26.8 IC27.7 IC27.8 IC32.14 IC43.8 J9.30 R61.1 R109.1 TP4.1 | length 517.4
  Top Layer w0.2: v1(8.217,20.755) 11.308,17.663 20.457,17.663 21.001,18.207 21.001,18.589 21.573,19.161 22.336,19.161 22.497,19.322 25.664,19.322 26.642,20.3 29.85,20.3 30.379,19.771 31.025,19.771 31.621,19.174 31.621,17.697 31.392,17.468 30.957,17.033 30.957,16.888 30.778,16.708 30.778,16.319 30.594,16.135 30.594,14.312 30.808,14.097 30.808,14.029 31.846,12.992 34.563,12.992 v1(35.79,11.766)
  Top Layer w0.3: v1@20.87,35.809 v1(20.816,35.809) 20.825,35.801 23.063,35.801 23.071,35.792 23.874,35.792 24.05,35.617 24.05,35 IC26.8@24.125,34.925 ; v1(21.926,72.501) 21.934,72.509 22.731,72.509 C76.2@22.739,72.517 24.575,72.517 24.65,72.442 IC27.7@24.65,72.127 ; v1(112.956,83.193) 113.584,82.565 R61.1@114.311,82.565 ; v1(125.027,83.095) 126.379,83.095 R109.1@126.414,83.13 ; TP4.1@126.414,80.943 R109.1@126.414,83.13 ; R109.1@126.427,83.143 R109.1@126.414,83.13 ; D12.1@170.141,7.368 170.141,11.437 171.681,12.977 J9.30@171.681,14.381 ; IC16.4@178.737,12.387 179.731,12.387 180.101,12.757 v1(180.155,12.757) ; v1(179.054,17.099) 179.071,17.082 179.071,16.059 C65.2@179.087,16.043 ; IC32.14@183.327,9.593 183.277,9.643 C100.2@183.277,11.043 v1(184.224,11.043)
  Int2 (PWR) w0.2: v1(8.217,20.755) 8.217,32.267 11.82,35.87 20.343,35.87 20.347,35.866 20.759,35.866 v1(20.816,35.809)
  Int2 (PWR) w0.3: v1(21.926,72.501) 18.892,72.501 18.418,72.028 17.243,72.028 16.779,72.492 13.995,72.492 13.819,72.317 13.819,72.24 13.643,72.064 12.987,72.064 12.691,72.36 11.418,72.36 10.67,71.612 10.67,68.053 11.354,67.369 11.354,56.643 12.627,55.37 15.382,55.37 15.967,54.785 26.221,54.785 27.348,53.658 27.348,49.773 27.885,49.237 50.508,49.237 50.552,49.193 79.395,49.193 79.527,49.325 79.644,49.325 ; 79.647,49.322 79.644,49.325 ; v1(105.476,50.382) 104.014,50.382 103.954,50.442 102.063,50.442 100.946,49.325 79.644,49.325 ; v1(112.956,83.193) 114.247,84.484 123.638,84.484 v1(125.027,83.095)
  Bottom Layer w0.3: v1(35.79,11.766) 86.404,11.766 91.5,6.67 111.109,6.67 ; 110.956,40.307 110.956,37.09 111.132,36.914 111.34,36.914 111.54,36.714 111.54,23.389 112.102,22.827 112.102,22.304 111.971,22.173 111.971,20.503 110.998,19.529 110.998,6.695 ; 111.022,6.695 111.022,4.04 112.958,2.104 116.384,-1.322 119.622,-1.322 120.562,-2.262 121.359,-2.262 122.782,-0.839 123.752,-0.839 125.589,0.998 ; 111.043,40.282 105.476,45.849 v1(105.476,50.382) 105.461,50.397 105.461,57.924 104.546,58.839 104.546,61.379 106.956,63.789 110.058,63.789 110.172,63.903 110.226,63.903 111.087,64.764 111.087,77.327 111.081,77.333 111.081,83.193 v1(112.956,83.193) ; 111.081,77.033 ccw(c111.589,77.035) 111.087,76.958 ; 125.676,0.973 147.717,0.973 157.14,10.395 163.625,10.395 164.027,10.797 164.027,11.798 164.554,12.325 164.554,20.656 164.73,20.832 169.799,20.832 170.435,20.196 170.435,15.628 J9.30@171.681,14.381 174.967,11.096 179.555,11.096 180.155,11.696 ; 154.089,7.344 158.735,2.698 165.069,2.698 166.352,3.981 C103.2@166.352,4.693 ; IC43.8@164.492,4.733 164.502,4.723 166.157,4.723 C103.2@166.167,4.713 ; v1(179.054,17.099) 179.425,16.728 179.425,13.457 180.125,12.757 v1(180.155,12.757) 180.155,11.696 ; v1(184.224,11.043) 183.571,11.696 180.155,11.696
P3V3A: C56A.2 C56B.2 C57A.1 C57B.1 C58A.2 C58B.2 C61A.2 C61B.2 C98.2 C245A.1 C245B.1 FB2A.1 FB2B.1 IC10A.5 IC10B.5 IC11A.2 IC11A.14 IC11A.16 IC11B.2 IC11B.14 IC11B.16 IC12A.5 IC12B.5 IC17A.5 IC17B.5 IC24A.5 IC24B.5 IC31.3 R20.1 R62A.2 R62B.2 R71A.2 R71B.2 R110.1 TP5.1 | length 383.6
  Top Layer w0.2: C57B.1@36.605,31.543 v1(37.434,31.543) ; C57A.1@36.605,68.543 v1(37.557,68.543)
  Top Layer w0.245: R62B.2@12.184,19.857 13.563,19.857 v1(13.584,19.836) ; R62A.2@13.033,56.524 13.589,56.524 v1(13.965,56.9) ; v1(15.144,56.621) 16.64,56.621 16.872,56.39 17.31,56.39 R71A.2@17.406,56.295 ; v1(16.116,19.911) 16.185,19.911 16.363,19.733 16.712,19.733 R71B.2@16.864,19.581 ; FB2B.1@21.142,32.636 24.347,32.636 24.576,32.865 25.358,32.865 25.474,32.749 v1(26.325,32.749) ; FB2A.1@21.252,70.319 21.255,70.323 21.792,70.323 22.162,69.953 22.162,69.555 v1(22.211,69.507) ; v1(34.927,32.253) 34.927,32.876 IC12B.5@35.013,32.962 ; IC12A.5@35.013,69.962 35.338,69.962 35.689,69.611 35.961,69.611 v1(36.065,69.507) ; v1(42.268,71.393) 42.268,71.433 42.708,71.873 43.767,71.873 44.236,72.342 44.876,72.342 C61A.2@44.927,72.393 ; v1(43.512,33.984) 43.512,34.868 IC10B.5@43.517,34.873 43.767,34.873 44.236,35.342 44.876,35.342 C61B.2@44.927,35.393 ; v1(53.868,30.308) 53.973,30.412 54.215,30.412 C56B.2@54.695,30.893 55.127,30.893 55.255,31.021 ; C56A.2@54.695,67.893 55.127,67.893 55.255,68.021 ; v1@54.696,67.127 C56A.2@54.695,67.893 ; IC11B.16@56.477,30.668 56.379,30.766 55.51,30.766 55.255,31.021 ; IC11A.16@56.477,67.668 56.379,67.766 55.51,67.766 55.255,68.021 ; IC11B.2@62.377,31.318 60.302,31.318 59.652,31.968 IC11B.14@56.477,31.968 56.379,31.87 55.666,31.87 55.427,31.631 55.427,31.193 55.255,31.021 ; IC11A.2@62.377,68.318 60.302,68.318 59.652,68.968 IC11A.14@56.477,68.968 56.379,68.87 55.666,68.87 55.427,68.631 55.427,68.193 55.255,68.021 ; IC24B.5@76.26,34.238 76.333,34.165 77.042,34.165 77.226,33.981 78.727,33.981 78.957,33.752 IC17B.5@79.427,33.752 ; v1(78.067,33.079) 78.067,33.693 ; IC17B.5@79.344,33.9 79.427,33.817 IC17B.5@79.427,33.752 ; IC17B.5@79.427,33.693 IC17B.5@79.427,33.752 ; IC17B.5@79.617,33.752 IC17B.5@79.427,33.752 ; v1(117.519,72.689) 117.922,72.689 118.003,72.769 119.699,72.769 ; R110.1@123.427,83.143 TP5.1@123.427,80.943 122.278,80.943 121.808,80.473 R20.1@121.788,80.473 121.213,79.897 121.213,76.961 119.699,75.448 119.699,72.769 ; v2(125.077,73.318) 123.977,73.318 123.977,72.955 123.791,72.769 122.8,72.769 122.175,72.769 119.699,72.769
  Top Layer w0.3: C245B.1@76.16,35.818 76.16,34.338 IC24B.5@76.26,34.238 ; C245A.1@76.177,72.943 76.26,72.86 IC24A.5@76.26,71.238 77.336,71.238 77.851,70.722 C58A.2@78.096,70.722 ; v1(78.067,69.943) C58A.2@78.067,70.693 C58A.2@78.096,70.722 ; IC17A.5@79.427,70.693 79.398,70.722 C58A.2@78.096,70.722
  Int2 (PWR) w0.245: v1(13.584,19.836) 14.081,20.333 14.817,20.333 ; v1(13.965,56.9) 14.431,57.366 15.525,57.366 ; v1(15.144,56.621) 15.144,56.638 15.525,57.019 15.525,57.366 ; v1(16.116,19.911) 16.086,19.911 15.665,20.333 14.817,20.333 ; v1(37.434,31.543) 37.434,33.18 ; v1(42.268,71.393) 42.594,71.067 42.594,69.507 ; v1(43.512,33.984) 43.512,33.91 42.782,33.18 ; v1(117.427,64.44) 114.48,64.44 113.839,63.799 112.842,63.799 112.796,63.845 111.174,63.845 110.322,62.993 106.927,62.993 104.335,65.585 103.602,65.585 102.846,64.828 98.746,64.828 97.382,66.192 94.168,69.406 92.498,69.406 91.687,70.218 83.152,70.218 82.968,70.401 81.419,70.401 80.961,69.943 v1(78.067,69.943) 77.01,69.943 76.798,69.73 76.798,68.814 74.949,66.965 65.739,66.965 64.936,67.769 64.522,67.769 63.718,66.965 58.386,66.965 58.15,67.202 56.496,67.202 56.42,67.126 v1(54.697,67.126) 52.57,67.126 52.494,67.202 50.436,67.202 50.177,66.943 45.157,66.943 42.594,69.507 ; v1(117.843,26.718) 115.847,26.718 115.282,26.154 111.211,26.154 110.965,25.907 107.049,25.907 105.031,27.925 99.285,27.925 97.791,29.42 97.791,29.608 96.45,30.949 93.896,30.949 91.478,33.366 78.389,33.366 78.102,33.079 78.063,33.079 75.041,30.057 58.294,30.057 58.044,30.308 v1(53.868,30.308) 50.542,30.308 50.177,29.943 43.374,29.943 43.024,30.293 42.552,30.293 42.259,30.585 42.259,30.999 42.782,31.522 42.782,33.18 ; 14.817,20.333 14.817,20.925 16.241,22.348 16.241,22.941 18.018,24.717 18.018,29.4 20.229,31.611 20.792,31.611 23.082,33.901 25.173,33.901 27.342,31.732 28.682,31.732 29.051,31.363 31.348,31.363 32.239,32.253 v1(34.927,32.253) 34.964,32.29 35.545,32.29 36.434,33.18 37.434,33.18 ; 15.525,57.366 15.525,61.134 17.857,63.467 17.857,65.808 17.905,65.856 17.905,66.339 21.072,69.507 v1(22.211,69.507) 22.909,70.204 26.676,70.204 27.075,69.806 27.075,69.243 28.135,68.183 30.811,68.183 31.338,68.71 32.846,68.71 33.643,69.507 v1(36.065,69.507) 38.816,69.507 39.003,69.693 41.545,69.693 41.732,69.507 42.594,69.507 ; 37.434,33.18 42.782,33.18
  Int2 (PWR) w0.3: v1(37.557,68.543) 37.557,69.472
  Bottom Layer w0.245: v1(117.427,64.44) 117.473,64.486 117.473,66.719 ; v1(117.519,72.689) 117.473,72.643 117.473,66.719 ; v1(117.843,26.718) 118.415,27.29 118.415,31.736 118.603,31.924 118.603,34.815 118.95,35.162 118.95,36.653 118.73,36.873 118.73,37.111 118.189,37.652 118.189,44.573 120.686,47.07 120.686,64.396 118.363,66.719 117.473,66.719
  other v2: 127.927,71.643 128.777,71.643 127.027,71.693 125.002,71.793 126.102,71.793 124.052,71.868 128.377,72.468 127.552,72.493 126.627,72.568 125.602,72.618 124.527,72.693 128.777,73.193 127.952,73.268 126.127,73.293 127.102,73.293 125.642,73.93 126.58,73.93 128.377,73.943 127.502,73.993 124.527,74.018 125.16,74.734 126.052,74.734 124.002,74.768 127.002,74.768 127.93,74.764 128.822,74.764 126.502,75.493 125.602,75.518 124.577,75.543 128.402,75.543 127.452,75.568 125.102,76.268 126.052,76.268 124.052,76.293 126.977,76.293 127.902,76.293 128.777,76.318
P3V3REF: C71.1 C94.2 FB1.2 IC20.9 | length 6.2
  Top Layer w0.245: FB1.2@133.035,14.543 133.09,14.598 C71.1@133.09,16.099 ; FB1.2@133.122,14.518 133.803,14.518 133.952,14.369 133.952,13.616 133.504,13.168 C94.2@133.375,13.168 ; C71.1@133.177,16.074 133.868,16.074 134.253,16.459 135.179,16.459 IC20.9@135.188,16.468
P5V0A: C30.2 C31.1 C106.1 C107.1 C120A.2 C120B.2 IC8.4 IC18.6 IC22A.8 IC22B.8 IC28.6 IC29.6 L1A.1 L1B.1 L2A.2 L2B.2 L5A.2 L5B.2 R80.2 R82.2 R124A.2 R124B.2 R216.1 TP16.1 | length 318.2
  Top Layer w0.2: 132.751,68.728 133.041,68.438 R82.2@133.635,68.438
  Top Layer w0.245: v1(125.027,63.706) 125.027,66.35 ; 129.427,70.75 129.427,77.693 131.796,80.062 TP16.1@131.796,80.943
  Top Layer w0.25: 125.027,66.35 129.427,70.75
  Top Layer w0.3: R124B.2@29.945,21.279 v1(31.745,21.279) ; R124A.2@32.193,57.092 32.275,57.011 v1(32.275,56.15) ; v1(40.215,22.497) 40.581,22.13 41.613,22.13 IC22B.8@41.63,22.148 ; IC22B.8@41.656,22.173 43.487,22.173 C120B.2@43.512,22.199 ; v1(111.614,72.18) 111.614,72.126 111.292,71.804 111.292,70.073 111.558,69.806 C106.1@112.156,69.806 ; C106.1@112.138,69.789 IC18.6@113.852,69.789 ; IC29.6@117.576,21.433 119.088,21.433 119.263,21.609 119.263,22.043 C107.1@119.374,22.154 119.374,23.913 118.737,24.55 118.362,24.55 v1(117.919,24.993) ; TP16.1@131.796,80.943 R216.1@131.796,83.143 ; 142.206,65.324 142.222,65.308 R80.2@143.027,65.308
  Top Layer w0.5: v1(40.215,22.497) 40.215,22.524 40.744,23.053 v1(40.744,24.921)
  Top Layer w0.508: IC22B.8@41.63,22.148 IC22B.8@41.656,22.173 ; IC22A.8@41.707,59.235 41.732,59.261 43.568,59.261 43.597,59.289 C120A.2@43.62,59.267 ; L2B.2@53.217,28.213 54.27,28.213 54.593,28.536 v1(55.756,28.536) 64.306,28.536 66.06,30.29 72.829,30.29 73.127,29.992 L1B.1@73.127,29.043 73.137,29.033 78.711,29.033 79.968,30.29 83.298,30.29 84.403,31.395 93.08,31.395 95.591,28.884 v1(95.881,28.884) ; L2A.2@53.217,65.213 v1(54.568,65.213) 63.983,65.213 66.06,67.29 72.589,67.29 72.677,67.202 ; L1A.1@72.677,66.013 72.677,67.202 ; v1(94.985,66.518) 94.133,66.518 92.452,68.199 84.207,68.199 83.21,67.202 72.677,67.202 ; L5A.2@95.823,60.156 95.848,60.156 96.671,60.979 96.965,60.979 v1(96.983,60.997) ; L5B.2@96.201,23.32 97.167,23.32 97.464,23.618 97.464,24.5 v1(96.915,25.05) ; C30.2@132.461,67.478 132.461,68.438 132.751,68.728 133.041,69.018 133.041,70.104 IC28.6@133.066,70.129 ; C30.2@132.56,67.478 132.717,67.321 132.717,63.319 v1(132.592,63.193) 133.033,62.752 133.052,62.752 v1(133.052,62.727) ; v1(139.027,63.543) C31.1@142.228,63.543 ; C31.1@142.206,63.521 142.206,65.324 142.206,67.126 IC8.4@142.263,67.183 ; R80.2@142.991,65.364 143.027,65.328 R80.2@143.027,65.308
  Int2 (PWR) w0.245: 125.027,62.9 v1(125.027,63.706)
  Int2 (PWR) w0.5: v1(31.745,21.279) 33.425,21.279 33.931,20.774 38.492,20.774 v1(40.215,22.497) ; 104.309,63.706 104.666,63.349 ; v1(111.614,72.18) 111.588,72.18 111.311,71.903 111.311,71.383 114.516,68.178 117.344,68.178 119.379,66.143 124.456,66.143 125.486,65.112 125.486,63.818
  Int2 (PWR) w0.508: v1(32.275,56.15) 34.159,58.034 34.395,58.034 34.41,58.049 42.578,58.049 42.876,58.346 42.876,60.113 44.706,61.943 51.298,61.943 v1(54.568,65.213) ; v1(40.744,24.921) 40.744,25.324 43.567,28.148 49.733,28.148 50.121,28.536 v1(55.756,28.536) ; v1@95.052,66.518 v1(94.985,66.518) 96.108,65.348 96.115,65.341 96.983,64.474 v1(96.983,60.997) ; v1@95.986,28.884 96.877,27.993 96.877,26.943 ; v1(96.915,25.05) 96.897,25.068 96.897,26.109 96.877,26.129 96.877,26.943 ; 96.983,63.706 104.309,63.706 ; 104.666,63.349 106.368,61.647 110.879,61.647 111.732,62.499 112.238,62.499 112.496,62.242 ; 112.496,62.241 112.815,61.921 113.338,61.921 113.435,62.018 114.73,62.018 115.299,62.587 116.01,62.587 116.072,62.525 117.113,62.525 v1(117.13,62.507) 118.244,62.507 118.637,62.9 125.027,62.9 125.564,62.9 125.738,62.727 v1(133.052,62.727) 133.192,62.727 135.793,65.328 ; v1(116.965,25.014) 116.847,25.014 116.414,24.581 106.488,24.581 104.494,26.575 98.3,26.575 97.932,26.943 96.877,26.943 ; v1@116.987,24.993 v1(117.919,24.993)
  Int1 (GND) w0.3: v1@111.614,72.126 v1(111.614,72.18)
  Bottom Layer w0.508: 116.904,36.935 117.093,37.124 ; 117.093,26.325 117.584,25.834 117.584,25.312 117.904,24.993 v1(117.919,24.993) ; v1(117.13,62.507) 117.155,62.507 117.636,62.026 117.877,62.026 118.227,61.677 118.227,53.005 117.18,51.958
  other v1: 42.876,59.258 117.677,63.08 133.351,63.343 139.627,63.543 140.227,63.543 140.827,63.543
P5V5: C33.2 C34.2 C35.2 C68.2 IC5.6 IC30.2 L9.2 L10.1 R28.2 R106.1 TP1.1 | length 53.9
  Top Layer w0.245: TP1.1@134.277,81.002 TP1.1@134.336,80.943 ; v1(149.208,80.809) 150.803,79.215 150.803,76.157 153.535,73.425 153.535,71.972 ; L10.1@154.004,70.841 L10.1@154.802,70.043 ; IC5.6@165.906,73.283 C34.2@165.906,75.183 ; C34.2@165.927,75.31 165.947,75.29 166.886,75.29 v1(166.905,75.271)
  Top Layer w0.3: TP1.1@134.336,80.943 v1(134.336,82.018) R106.1@134.336,83.095
  Top Layer w0.508: L10.1@154.802,70.043 L10.1@154.802,70.818 ; C35.2@158.56,77.091 158.881,76.77 C35.2@158.976,76.77 ; L9.2@159.592,73.133 L9.2@159.677,73.218 160.441,73.218 L9.2@161.112,73.889 ; IC30.2@176.147,72.543 176.306,72.702 176.306,73.847 C68.2@177.127,74.668 ; v1(176.177,75.943) 176.177,75.668 177.127,74.718 C68.2@177.127,74.668 ; C68.2@177.127,74.693 C68.2@177.127,74.668
  Int2 (PWR) w0.245: v1(134.336,82.018) 135.545,80.809 v1(149.208,80.809)
  Int2 (PWR) w0.508: v1(162.58,75.271) 162.939,74.912 165.488,74.912 165.847,75.271 v1(166.905,75.271) 167.699,76.064 173.206,76.064 173.327,75.943 v1(176.177,75.943)
P5V5A: C27.1 C28.2 C97.2 IC8.2 IC28.3 IC31.2 L10.2 R102.2 | length 17.2
  Top Layer w0.3: R102.2@137.527,63.973 138.14,63.973 138.927,64.76 138.927,65.742
  Top Layer w0.508: IC31.2@128.448,66.206 128.694,66.452 IC31.2@128.694,67.536 ; v1(130.162,69.004) 130.162,76.878 130.774,77.49 132.894,77.49 133.192,77.192 133.192,76.684 133.112,76.605 133.112,75.575 IC28.3@133.066,75.529 ; L10.2@149.208,70.087 L10.2@149.252,70.043
  other v1: 129.723,68.635 139.723,69.004 130.223,69.635 139.473,69.635 139.973,70.135